# Altium PCB PCB1.PcbDoc (part 1 of 2)
Units mm, origin at the board's own origin, x right, y up, seen from the top; angles counter-clockwise.
Board outline 28 x 30 mm, 4 copper layers (Top Layer, GND, POWER, Bottom Layer), stack 0.778 mm thick; 63 components, 74 nets, 532 pads, 184 vias.
Unrouted connection lines stored in the file: 4.
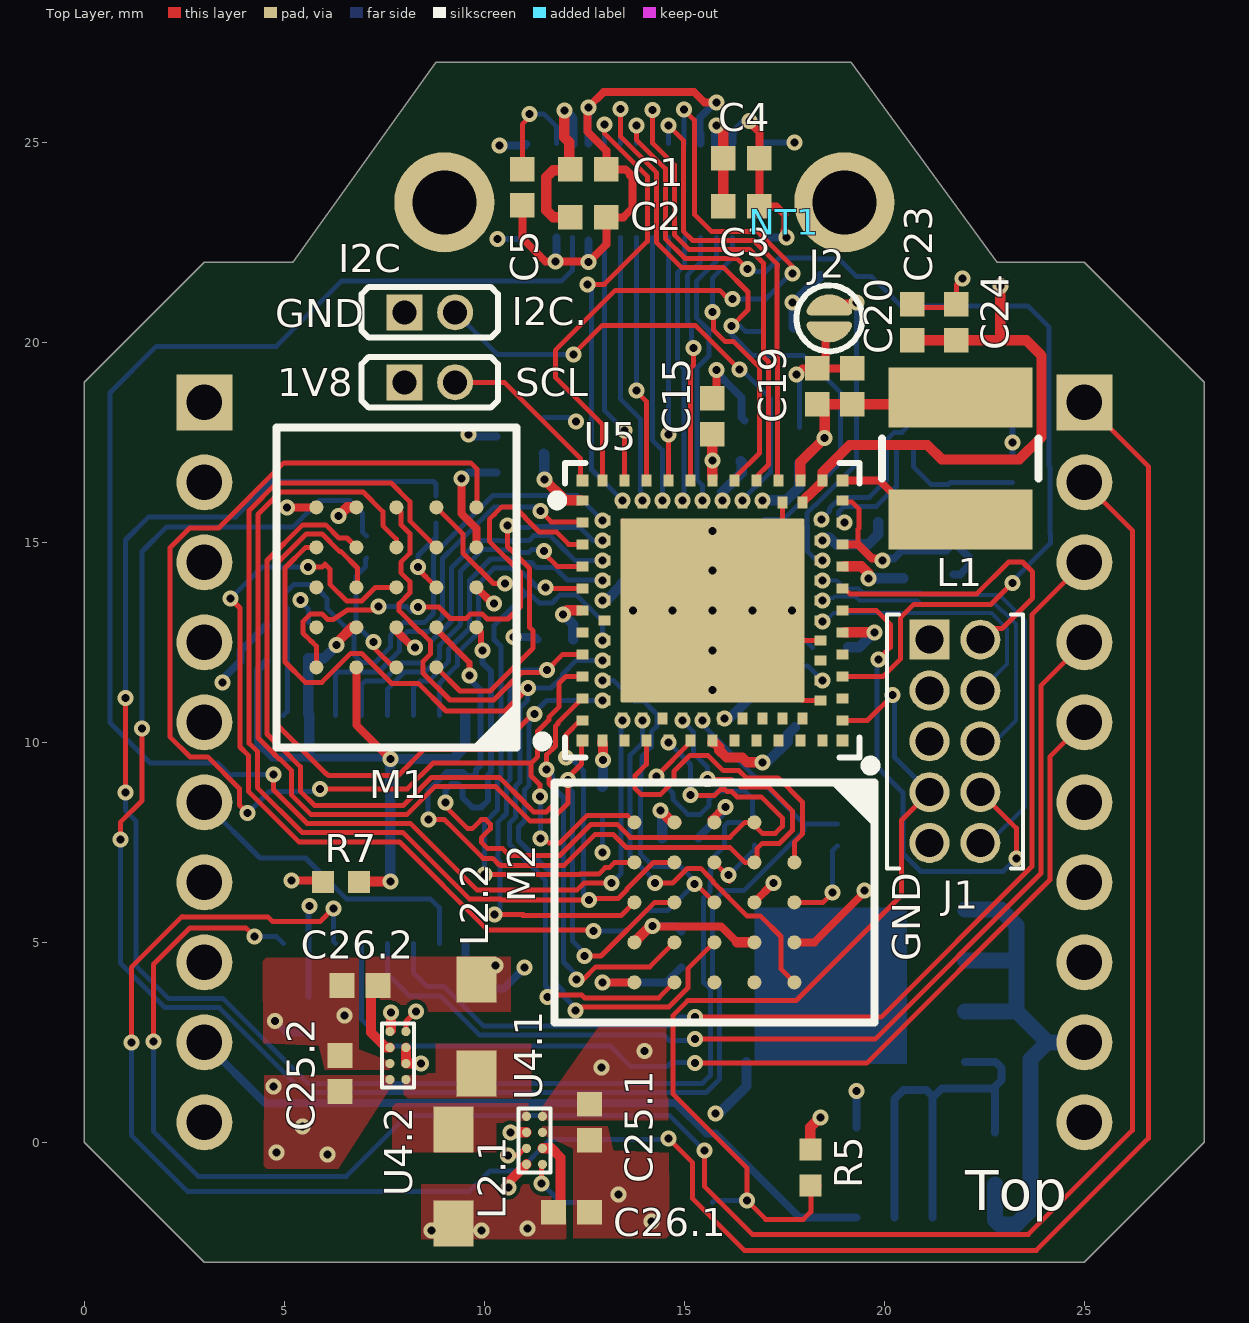
[diagram p0: Top Layer view]
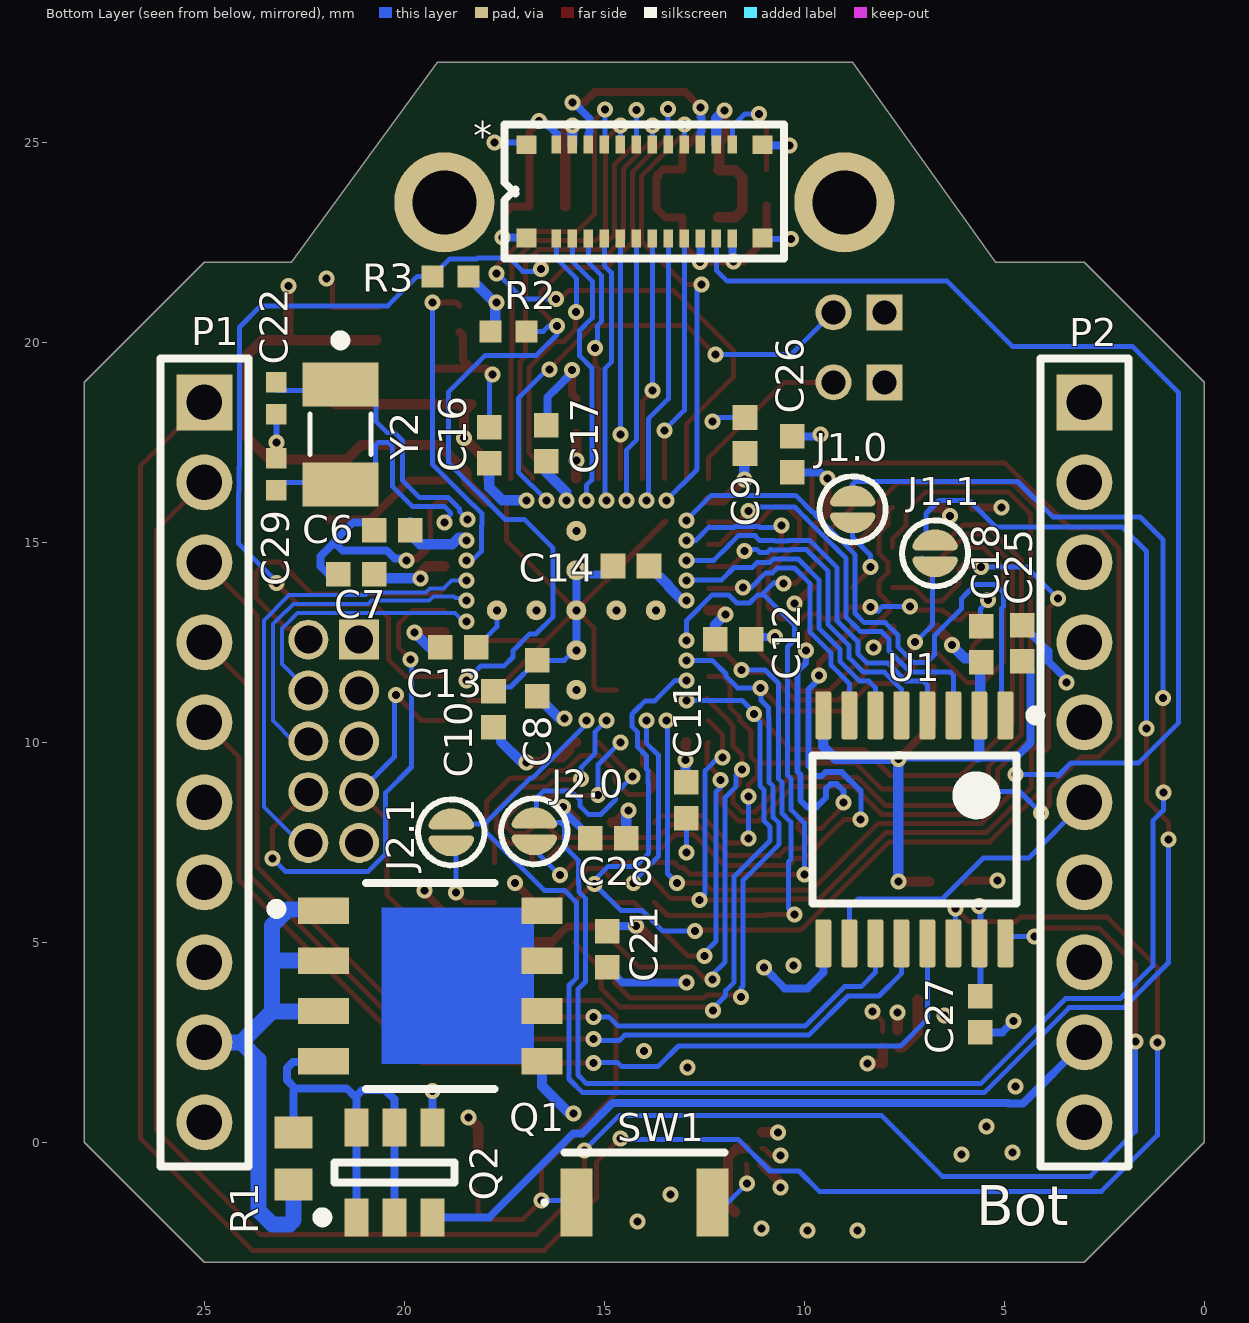
[diagram p1: Bottom Layer view, seen from below]
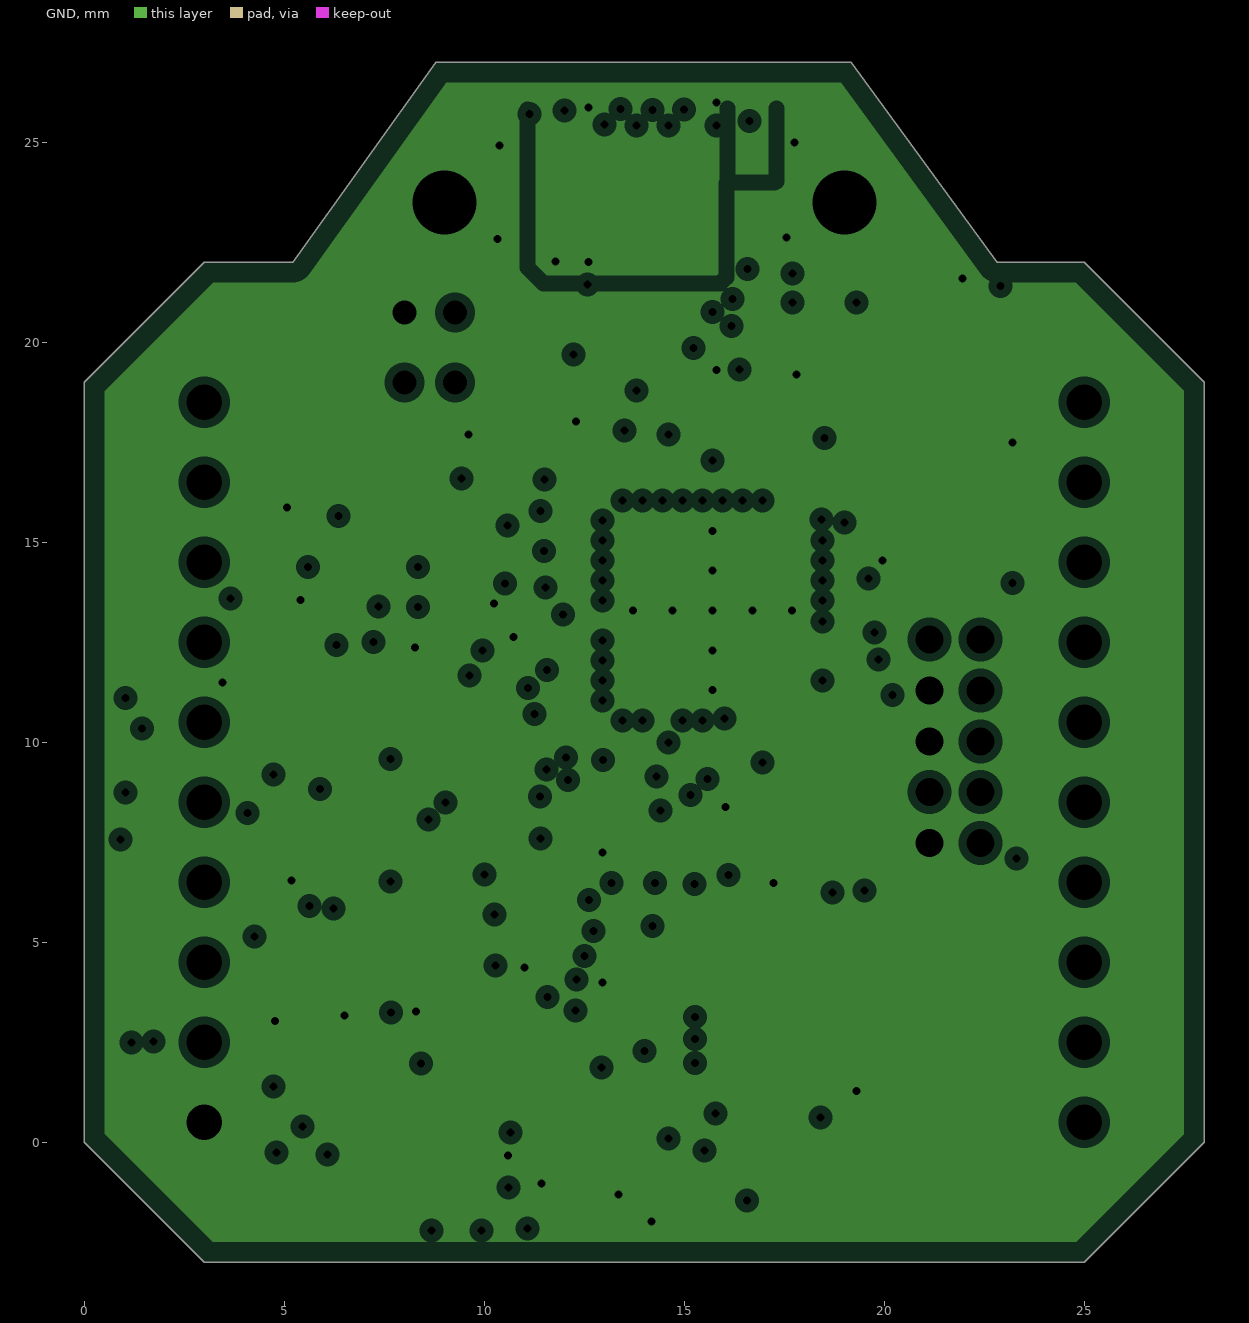
[diagram p2: GND, clearances drawn from the general rule]
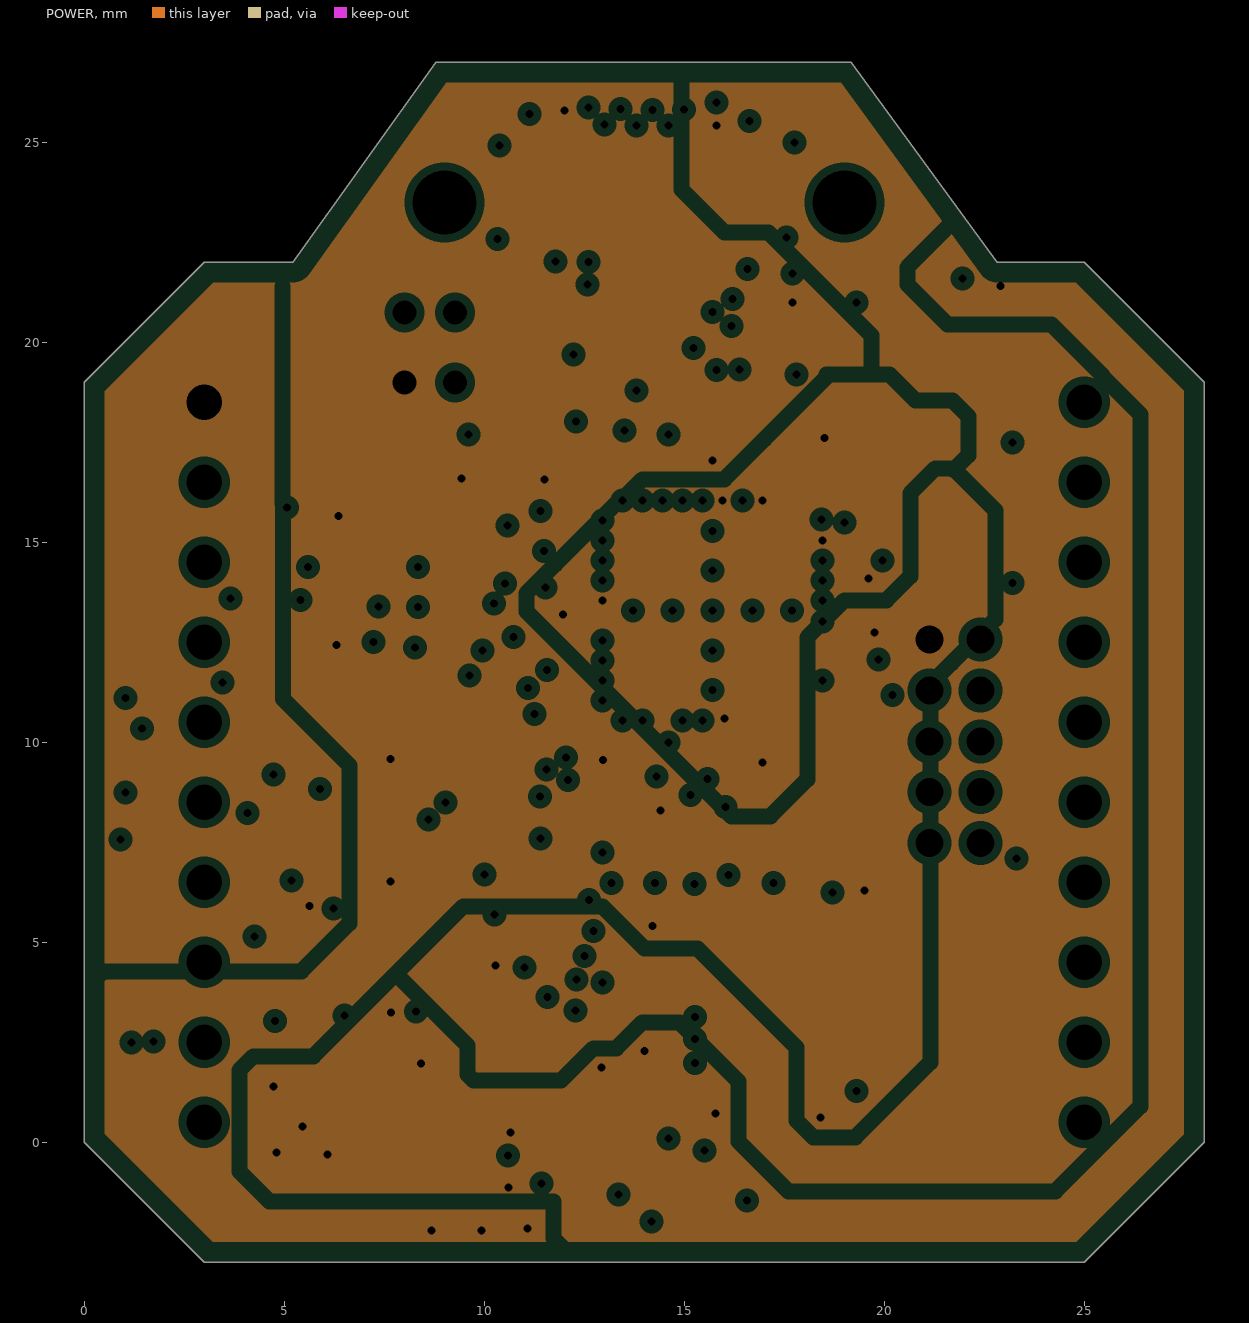
[diagram p3: POWER, clearances drawn from the general rule]

## Layer stack, top to bottom
Top Solder: solder mask 0.0102, Solder Resist, Dk 3.5
Top Layer: signal copper 0.0356
Dielectric 1: core 0.254, FR-4, Dk 4.2
GND: plane copper 0.036, net AGND
Dielectric 3: prepreg 0.127, Dk 4.2
POWER: plane copper 0.036, net (Multiple Nets)
Dielectric 2: core 0.254, Dk 4.2
Bottom Layer: signal copper 0.0356
Bottom Solder: solder mask 0.0102, Solder Resist, Dk 3.5

## Board outline
8.786,27 5.214,22 3,22 0,19 0,0 3,-3 25,-3 28,0 28,19 25,22 22.823,22 19.177,27

## Design rules (kind name [scope] priority, off if disabled: settings)
BoardOutlineClearance switch [InComponent('SW1')] p1: gap=0.2 ignorepadtopadclearanceinfootprint=FALSE except(-0.6: Track-OutlineEdge Track-CavityEdge Track-CutoutEdge Track-SplitBarrior Track-SplitContinuation)
BoardOutlineClearance [All] p2: gap=0.2 ignorepadtopadclearanceinfootprint=FALSE
Clearance Clearance_1 [ispad and InComponent('Q1') vs IsFill] p1: gap=0 ignorepadtopadclearanceinfootprint=FALSE
Clearance Clearance_pulp [All] p2: gap=0.1 ignorepadtopadclearanceinfootprint=FALSE except(0: Arc-Hole Track-Hole SMDPad-Hole THPad-Hole Via-Hole Fill-Hole Poly-Hole Region-Hole Text-Hole)
Clearance [All] p3: gap=0.1 ignorepadtopadclearanceinfootprint=FALSE
ComponentClearance ComponentClearance_moreweirdtphole [InComponent('TP27') vs InComponent('U2')] p1: gap=0 collisioncheckmode=3 verticalgap=0 showdistances=FALSE
ComponentClearance ComponentClearance_weird_tp_holes [InComponent('TP25') vs InComponent('TP26')] p2: gap=0 collisioncheckmode=3 verticalgap=0 showdistances=FALSE
ComponentClearance ComponentClearance_TPunderlatch [InComponent('U2') vs InComponent('TP23') or InComponent('JP21') or InComponent('JP27') or InComponent('JP24') or InComponent('JP25') or InComponent('JP26')] p3: gap=0 collisioncheckmode=3 verticalgap=0 showdistances=FALSE
ComponentClearance ComponentClearance_NetTie [InComponentClass('NetTie')] p4: gap=0 collisioncheckmode=3 verticalgap=0 showdistances=TRUE
ComponentClearance ComponentClearance_Hole [InComponentClass('Holes, Screws etc.')] p5: gap=0 collisioncheckmode=3 verticalgap=0 showdistances=TRUE
ComponentClearance [All] p6: gap=0.15 collisioncheckmode=3 verticalgap=0.15 showdistances=TRUE
DiffPairsRouting [All] p1: maxlimit=0.381 minlimit=0.125 mostfreqgap=0.125 toplayer_minwidth=0.125 toplayer_maxwidth=0.381 toplayer_prefwidth=0.3 bottomlayer_minwidth=0.125 bottomlayer_maxwidth=0.381 bottomlayer_prefwidth=0.3 maxuncoupledlength=12.7
FabricationTestpoint [All] p1: side=3 testpointundercomponent=TRUE minsize=0.5 maxsize=2.54 preferedsize=1.524 minholesize=0 maxholesize=1.016 preferedholesize=0.813 testpointgrid=0.025 allowsidetop=TRUE allowsidebottom=TRUE usegrid=TRUE gridtolerance=0
FanoutControl Fanout_BGA_1 [InComponent('U1')] p1: bgadir=Out bgaviamode=Centered fanoutstyle=BGA fanoutdirection=Alternating viagrid=0.025 // Fanout_BGA (Default Rule)
FanoutControl Fanout_BGA [IsBGA] p2: bgadir=Out bgaviamode=Centered fanoutstyle=Auto fanoutdirection=Alternating viagrid=0.025 // Fanout_BGA (Default Rule)
FanoutControl Fanout_LCC [IsLCC] p3: bgadir=Out bgaviamode=Centered fanoutstyle=Auto fanoutdirection=Alternating viagrid=0.025 // Fanout_LCC (Default Rule)
FanoutControl Fanout_SOIC [IsSOIC] p4: bgadir=Out bgaviamode=Centered fanoutstyle=Auto fanoutdirection=Alternating viagrid=0.025 // Fanout_SOIC (Default Rule)
FanoutControl Fanout_Small [(CompPinCount < 5)] p5: bgadir=Out bgaviamode=Centered fanoutstyle=Auto fanoutdirection=OutThenIn viagrid=0.025 // Fanout_Small (Default Rule)
FanoutControl Fanout_Default [All] p6: bgadir=Out bgaviamode=Centered fanoutstyle=Auto fanoutdirection=Alternating viagrid=0.025 // Fanout_Default (Default Rule)
Height [All] p1: minheight=0 maxheight=50 prefheight=12.7
HoleSize [All] p1: absolutevalues=TRUE maxlimit=5 minlimit=0.2 maxpercent=80.000 minpercent=20.000
HoleToHoleClearance [All] p1: gap=0.25 allowstackedmicrovias=FALSE
Length "InNet('CLK_0') Or InNet('CLK_1')" [InNet('CLK_0') Or InNet('CLK_1')] p1: maxlimit=36.773 minlimit=0
MatchedLengths [InDifferentialPair('CK2')] p1: tolerance=0.2 checknetsindiffpair=TRUE checkdiffpairvsdiffpair=FALSE checkxsignals=FALSE checkothers=FALSE
MinimumAnnularRing [All] p1: minimumring=0.1
MinimumSolderMaskSliver MinimumSolderMaskSliver_1 [InComponent('U2') and IsPad and InNet('GND')] p1: minsoldermaskwidth=0
MinimumSolderMaskSliver [All] p2: minsoldermaskwidth=0.095
PlaneClearance "Mounting Holes" [InPadClass('ExtendedClearance')] p1: clearance=2.1
PlaneClearance [All] p2: clearance=0.2
PlaneConnect [All] p1: pad.planeconnectstyle=Relief pad.reliefexpansion=0.25 pad.reliefentries=4 pad.reliefconductorwidth=0.3 pad.reliefairgap=0.2 via.planeconnectstyle=Direct via.reliefexpansion=0.25 via.reliefentries=4 via.reliefconductorwidth=0.3 via.reliefairgap=0.2
PolygonConnect PadDirectConnect [InComponent('C25.1')  OR InComponent('C25.2')      OR InComponent('U4.1') OR InComponent('U4.2')      OR  InComponent('L2.1')  OR InComponent('L2.2')   OR InComponent('C26.1')  OR InComponent('C26.2')] p1: connectstyle=Direct reliefconductorwidth=0.3 reliefentries=4 polygonreliefangle="90 Angle" airgapwidth=0.25
PolygonConnect [All] p2: thpad.connectstyle=Relief thpad.reliefconductorwidth=0.25 thpad.reliefentries=4 thpad.polygonreliefangle="90 Angle" thpad.airgapwidth=0.25 smdpad.connectstyle=Relief smdpad.reliefconductorwidth=0.25 smdpad.reliefentries=4 smdpad.polygonreliefangle="90 Angle" smdpad.airgapwidth=0.25 via.connectstyle=Direct via.reliefconductorwidth=0.25 via.reliefentries=4 via.polygonreliefangle="90 Angle" via.airgapwidth=0.25
RoomDefinition GAP [InComponentClass('Room Definition 1')] p1: confinementstyle=ConfineIn formatcopy=TRUE lockcomponents=FALSE outline 11.7,9.7 11.7,17.3 19.5,17.3 19.5,9.7
RoutingVias [All] p1: holewidth=0.2 width=0.45 viastyle="Through Hole" minholewidth=0.2 minwidth=0.4 maxholewidth=0.3 maxwidth=1
ShortCircuit ShortCircuit_variant_footprint [IsPad and not InAnyNet vs IsPad and not InAnyNet] p1: allowed=TRUE
ShortCircuit [All] p2: allowed=FALSE
SilkToSilkClearance "SilkText Exception" [OnSilkscreen  And (IsText And Not IsDesignator) vs OnSilkscreen  And ((IsText And Not IsDesignator) or IsTrack)] p1: silktosilkclearance=0
SilkToSilkClearance [All] p2: silktosilkclearance=0.1
SilkToSolderMaskClearance [IsPad] p1: minsilkscreentomaskgap=0.1 clearancetoexposedcopper=TRUE
SolderMaskExpansion [All] p1: expansion=0.075
Width Width_PWR [InNetClass('POWER')] p1: maxlimit=0.6 minlimit=0.15 preferedwidth=0.2 minimp=50.000000 maximp=50.000000 favimp=50.000000
Width [All] p2: maxlimit=0.6 minlimit=0.1 preferedwidth=0.15 minimp=50.000000 maximp=50.000000 favimp=50.000000
13 further rules are at their usual default settings.

## Classes and differential pairs
net class Undefined: CK2_n CK2_p DQ0 DQ1 DQ2 DQ3 DQ4 DQ5 DQ6 DQ7 HYPER.RWDS
net class POWER: 1V8 2V8 3V0 PULP_VCC VCOM VCOM_CF
component class Power: C25 C25.1 C25.2 C26.1 C26.2 C27 L2.1 L2.2 Q1 Q2 R1 R7 U1 U4.1 U4.2
component class GAPandPeripherals: * C1 C2 C3 C4 C5 C6 C7 C8 C9 C10 C11 C12 C13 C14 C15 C16 C17 C18 C19 C20 C21 C22 C23 C24 C26 C28 C29 I2C I2C. J1 J1.0 J1.1 J2 J2.0 J2.1 L1 M1 M2 NT1 P1 P2 R2 R3 R5 SW1 U5 Y2
differential pair CK2: +CK2_p -CK2_n

## Components (designator, comment, footprint, x,y, rotation, side; value= is the part's Value field where it differs from the comment)
* "HM01B0_NeoPac" CONNECTOR_5037722410 14,23.85 r270 bottom
C1 "100nF" CAPC0402(1005)60_N 12.6,24.325 r180 top
C2 "10uF" CAPC0402(1005)60_N 12.6,23.125 r180 top
C3 "100nF" CAPC0402(1005)60_N 16.425,23.4 r180 top locked
C4 "10uF" CAPC0402(1005)60_N 16.425,24.6 r180 top
C5 "100nF" CAPC0402(1005)60_N 10.95,23.875 r270 top
C6 "100nF" CAPC0402(1005)60_N 20.3,15.3 r180 bottom
C7 "100nF" CAPC0402(1005)60_N 21.2,14.2 r180 bottom
C8 "100nF" CAPC0402(1005)60_N 16.675,11.6 r270 bottom
C9 "100nF" CAPC0402(1005)60_N 11.48,17.67 r270 bottom
C10 "100nF" CAPC0402(1005)60_N 17.768,10.825 r270 bottom
C11 "100nF" CAPC0402(1005)60_N 12.95,8.55 r90 bottom
C12 "100nF" CAPC0402(1005)60_N 11.775,12.575 r0 bottom
C13 "100nF" CAPC0402(1005)60_N 18.65,12.375 r0 bottom
C14 "100nF" CAPC0402(1005)60_N 14.336,14.408 r180 bottom
C15 "100nF" CAPC0402(1005)60_N 15.7,18.15 r270 top
C16 "100nF" CAPC0402(1005)60_N 17.875,17.425 r270 bottom
C17 "100nF" CAPC0402(1005)60_N 16.45,17.475 r270 bottom
C18 "100nF" CAPC0402(1005)60_N 5.575,12.45 r270 bottom
C19 "4.7uF" CAPC0402(1005)60_N 18.325,18.9 r270 top
C20 "100nF" CAPC0402(1005)60_N 19.2,18.9 r270 top
C21 "100nF" CAPC0402(1005)60_N 14.925,4.825 r90 bottom
C22 "10pF" CAPC0402(1005)60_L 23.2,18.6 r90 bottom
C23 "4.7uF" CAPC0402(1005)60_N 20.7,20.5 r270 top
C24 "100nF" CAPC0402(1005)60_N 21.8,20.5 r270 top
C25 "100nF" CAPC0402(1005)60_N 4.55,12.475 r270 bottom
C25.1 "4.7uF" CAPC0402(1005)60_N 12.629,0.5 r90 top
C25.2 "4.7uF" CAPC0402(1005)60_N 6.39,1.72 r270 top
C26 "100nF" CAPC0402(1005)60_N 10.3,17.2 r270 bottom
C26.1 "10uF" CAPC0402(1005)60_N 12.179,-1.75 r180 top
C26.2 "10uF" CAPC0402(1005)60_N 6.89,3.92 r0 top
C27 "100nF" CAPC0402(1005)60_N 5.6,3.2 r270 bottom
C28 "100nF" CAPC0402(1005)60_N 14.9,7.6 r180 bottom
C29 "10pF" CAPC0402(1005)60_L 23.2,16.7 r270 bottom
I2C "GRPB012VWVN-RC" "Pin Header, 1x2, TH" 8.635,19 r0 top
I2C. "GRPB012VWVN-RC" "Pin Header, 1x2, TH" 8.635,20.75 r0 top
J1 "20021111-00010T4LF" 20021111-00010T4LF 21.765,10.025 r270 top
J1.0 "Solder Jumper" "Small Solder Jumper" 8.79,15.825 r270 bottom value=1
J1.1 "Solder Jumper" "Small Solder Jumper" 6.73,14.725 r270 bottom value=1
J2 "Solder Jumper" "Small Solder Jumper" 18.625,20.6 r270 top value=1
J2.0 "Solder Jumper" "Small Solder Jumper" 16.75,7.775 r270 bottom value=1
J2.1 "Solder Jumper" "Small Solder Jumper" 18.825,7.75 r270 bottom value=1
L1 "SRN4026-220M" SRN4026 21.898,17.1 r270 top value=22uH
L2.1 "74479775222" "SMD 0805_A" 9.231,-0.85 r270 top
L2.2 "74479775222" "SMD 0805_A" 9.8,2.9 r90 top
M1 "S71KS512SC0" FBGA24_A-130 7.8,13.875 r180 top
M2 "S71KS512SC0" FBGA24_A-130 15.75,6 r270 top
NT1 "Net Tie" "Net Tie" 17.5,23 r270 top net-tie
P1 "MTMM-110-03-T-S-126" SMTC-MTMM-110-03-X-S-126 25,18.5 r270 bottom locked
P2 "MTMM-110-03-T-S-126" SMTC-MTMM-110-03-X-S-126 3,18.5 r270 bottom locked
Q1 "SI7157DP-T1-GE3" PowerPAK_SO-8_V 19.35,3.91 r180 bottom
Q2 "NTGS3130NT1G" ONSC-TSOP-6-318G-02_V 20.25,-0.75 r90 bottom
R1 "100k" RESC1609X50X30NL8T20 22.77,-0.4 r270 bottom
R2 "10k" RESC1005X40X25NL05T05 17.39,20.27 r0 bottom
R3 "10k" RESC1005X40X25NL05T05 18.85,21.65 r180 bottom
R5 "10K" RESC1005X40X25NL05T05 18.15,-0.625 r90 top
R7 "10k" RESC1005X40X25NL05T05 6.42,6.51 r0 top
SW1 "B3U-3000P" OMRON-B3U-3000P_V 14,-1.5 r180 bottom
U1 "TXB0106PWR" PW0016A_L 7.25,7.825 r270 bottom
U4.1 "TPS62743YFPR" YFP0008AAAA 11.254,0.05 r0 top
U4.2 "TPS62743YFPR" YFP0008AAAA 7.84,2.17 r180 top
U5 "GAP8" RKC0088A_V 15.7,13.3 r0 top
Y2 "ABS07-32.768KHZ-7-T" ABRA-ABS07-2_V 21.6,17.7 r270 bottom

## Footprints (in the part's own frame and the unit in brackets; to place one, negate y for a bottom-side part, rotate by r counter-clockwise, add the part's x,y. Pads: shape width x height; smd on the part's side, far side on the other; paste and mask are expansions set on the pad)
20021111-00010T4LF [mm] "Terminal Assembly, 2x5 Pin, Vertical, 1.27mm Pitch, Male"
  rect 1x1 hole 0.7: 1(-2.54,-0.635)
  round 1 hole 0.7: 2(-2.54,0.635) 3(-1.27,-0.635) 4(-1.27,0.635) 5(0,-0.635) 6(0,0.635) 7(1.27,-0.635) 8(1.27,0.635) 9(2.54,-0.635) 10(2.54,0.635)
  silkscreen extent -3.17,-1.7 3.18,1.7, body extent -3.17,-1.7 3.18,1.7, height 5.51
ABRA-ABS07-2_V [mm] "Crystal, 2-Leads, Body 3.2x1.5mm, Pitch 2.5mm"
  rect 1.1x1.9 smd: 1(-1.25,0) 2(1.25,0)
  silkscreen extent -2.47,-0.76 0.51,0.76, body extent -1.6,-0.75 1.6,0.75, height 0.9
CAPC0402(1005)60_L [mm] "Chip Capacitor, Body 1.0x0.5mm, Height 0.6mm, IPC High Density"
  rect 0.52x0.52 smd: 1(-0.4,0) 2(0.4,0)
  body extent -0.55,-0.3 0.55,0.3, height 0.6
CAPC0402(1005)60_N [mm] "Chip Capacitor, Body 1.0x0.5mm, Height 0.6mm, IPC Medium Density"
  rect 0.62x0.62 smd: 1(-0.45,0) 2(0.45,0)
  body extent -0.55,-0.3 0.55,0.3, height 0.6
CONNECTOR_5037722410 [mm]
  rect 0.47x0.5 smd mask+0.102: 0(-1.09,2.95) 0(-1.09,-2.95) 0(1.24,-2.95) 0(1.24,2.95)
  rect 0.45x0.24 smd mask+0.025: 1(-1.1,-2.2) 2(-1.1,-1.8) 3(-1.1,-1.4) 4(-1.1,-1) 5(-1.1,-0.6) 6(-1.1,-0.2) 7(-1.1,0.2) 8(-1.1,0.6) 9(-1.1,1) 10(-1.1,1.4) 11(-1.1,1.8) 12(-1.1,2.2) 13(1.25,2.2) 14(1.25,1.8) 15(1.25,1.4) 16(1.25,1) 17(1.25,0.6) 18(1.25,0.2) 19(1.25,-0.2) 20(1.25,-0.6) 21(1.25,-1) 22(1.25,-1.4) 23(1.25,-1.8) 24(1.25,-2.2)
  silkscreen extent -1.6,-3.5 1.75,3.49
FBGA24_A-130 [mm] "BGA, 24-Balls, Body 8x6mm, Pitch 1mm, A1 missing"
  round 0.35 smd paste-0.5: A2(-1,2) A3(0,2) A4(1,2) A5(2,2) B1(-2,1) B2(-1,1) B3(0,1) B4(1,1) B5(2,1) C1(-2,0) C2(-1,0) C3(0,0) C4(1,0) C5(2,0) D1(-2,-1) D2(-1,-1) D3(0,-1) D4(1,-1) D5(2,-1) E1(-2,-2) E2(-1,-2) E3(0,-2) E4(1,-2) E5(2,-2)
  silkscreen extent -3.78,-4 3,4, body extent -3,-4 3,4, height 1.3
"Net Tie" [mm] "Net Tie, 0.15mm width, 0.5mm length"
  round 0.15 smd mask-0.2: 1(-0.25,0) 2(0.25,0)
  Top Layer lines w0.15: 0.25,0 -0.25,0
OMRON-B3U-3000P_V [mm] "SMD, 2-Leads, Body 4x3.2mm"
  rect 0.8x1.7 smd: 1(-1.7,0) 2(1.7,0)
  silkscreen extent -2.55,-0.05 2,1.25, body extent -2,-1.95 2,1.25, height 1.2
ONSC-TSOP-6-318G-02_V [mm] "SOP, 6-Leads, Body 3x1.5mm, Pitch 0.95mm"
  rect 0.95x0.6 smd: 1(-1.125,0.95) 2(-1.125,0) 3(-1.125,-0.95) 4(1.125,-0.95) 5(1.125,0) 6(1.125,0.95)
  silkscreen extent -1.25,-1.5 0.25,1.93, body extent -0.75,-1.5 0.75,1.5, height 1.1
"Pin Header, 1x2, TH" [mm] "Terminal Assembly, 1x2 Pins, Vertical, 1.27mm Pitch, Male, TH"
  rect 0.9x0.9 hole 0.6: 1(-0.635,0)
  round 0.9 hole 0.6: 2(0.635,0)
  silkscreen extent -1.7,-0.63 1.7,0.64, body extent -1.7,-0.63 1.7,0.64, height 6.3
PowerPAK_SO-8_V [mm] "PowerPAK SO-8, 8-Leads, Body 6.15x5.15mm, Pitch 1.25mm"
  rect 1.27x0.66 smd: 1(-2.67,1.88) 2(-2.67,0.627) 3(-2.67,-0.627) 4(-2.67,-1.88)
  rect 1.02x0.66 smd: 5(2.795,-1.88) 6(2.795,-0.627) 7(2.795,0.627) 8(2.795,1.88)
  Top Layer region: -1.215,1.955 2.595,1.955 2.595,-1.955 -1.215,-1.955
  silkscreen extent -3.98,-2.58 1.61,2.57, body extent -3.07,-2.57 3.08,2.58, height 1.04
PW0016A_L [mm] "SOP, 16-Leads, Body 5.1x4.5mm, Pitch 0.65mm, IPC High Density"
  rrect25% 1.2x0.4 smd: 1(-2.85,2.275) 2(-2.85,1.625) 3(-2.85,0.975) 4(-2.85,0.325) 5(-2.85,-0.325) 6(-2.85,-0.975) 7(-2.85,-1.625) 8(-2.85,-2.275) 9(2.85,-2.275) 10(2.85,-1.625) 11(2.85,-0.975) 12(2.85,-0.325) 13(2.85,0.325) 14(2.85,0.975) 15(2.85,1.625) 16(2.85,2.275)
  silkscreen extent -2.97,-2.55 1.85,3.15, body extent -3.21,-2.5 3.21,2.5, height 1
RESC1005X40X25NL05T05 [mm] "Chip Resistor, 2-Leads, Body 1.05x0.55mm, IPC Medium Density"
  rect 0.55x0.55 smd: 1(-0.45,0) 2(0.45,0)
  body extent -0.53,-0.28 0.53,0.28, height 0.4
RESC1609X50X30NL8T20 [mm] "Chip Resistor, 2-Leads, Body 1.65x0.95mm, IPC Medium Density"
  rect 0.8x0.95 smd: 1(-0.65,0) 2(0.65,0)
  body extent -0.82,-0.48 0.82,0.48, height 0.5
RKC0088A_V [mm] "QFN, 88-Leads, Body 7x7mm, Pitch 0.55mm, Thermal Pad 4.6x4.6mm, TI Recommend"
  rect 0.3x0.249 smd mask+0.035: A1(-3.25,2.75) A2(-3.25,2.2) A3(-3.25,1.65) A4(-3.25,1.1) A5(-3.25,0.55) A6(-3.25,0) A7(-3.25,-0.55) A8(-3.25,-1.1) A9(-3.25,-1.65) A10(-3.25,-2.2) A11(-3.25,-2.75) A23(3.25,-2.75) A24(3.25,-2.2) A25(3.25,-1.65) A26(3.25,-1.1) A27(3.25,-0.55) A28(3.25,0) A29(3.25,0.55) A30(3.25,1.1) A31(3.25,1.65) A32(3.25,2.2) A33(3.25,2.75) B1(-2.7,2.25) B2(-2.7,1.75) B3(-2.7,1.25) B4(-2.7,0.75) B5(-2.7,0.25) B6(-2.7,-0.25) B7(-2.7,-0.75) B8(-2.7,-1.25) B9(-2.7,-1.75) B10(-2.7,-2.25) B21(2.7,-2.25) B22(2.7,-1.75) B23(2.7,-1.25) B24(2.7,-0.75) B25(2.7,-0.25) B26(2.7,0.25) B27(2.7,0.75) B28(2.7,1.25) B29(2.7,1.75) B30(2.7,2.25)
  rect 0.249x0.3 smd mask+0.035: A12(-2.75,-3.25) A13(-2.2,-3.25) A14(-1.65,-3.25) A15(-1.1,-3.25) A16(-0.55,-3.25) A17(0,-3.25) A18(0.55,-3.25) A19(1.1,-3.25) A20(1.65,-3.25) A21(2.2,-3.25) A22(2.75,-3.25) A34(2.75,3.25) A35(2.2,3.25) A36(1.65,3.25) A37(1.1,3.25) A38(0.55,3.25) A39(0,3.25) A40(-0.55,3.25) A41(-1.1,3.25) A42(-1.65,3.25) A43(-2.2,3.25) A44(-2.75,3.25) B11(-2.25,-2.7) B12(-1.75,-2.7) B13(-1.25,-2.7) B14(-0.75,-2.7) B15(-0.25,-2.7) B16(0.25,-2.7) B17(0.75,-2.7) B18(1.25,-2.7) B19(1.75,-2.7) B20(2.25,-2.7) B31(2.25,2.7) B32(1.75,2.7) B33(1.25,2.7) B34(0.75,2.7) B35(0.25,2.7) B36(-0.25,2.7) B37(-0.75,2.7) B38(-1.25,2.7) B39(-1.75,2.7) B40(-2.25,2.7)
  rect 0.3x0.3 smd mask+0.035: D1(-3.25,3.25) D2(-3.25,-3.25) D3(3.25,-3.25) D4(3.25,3.25)
  round 0.5 hole 0.2 mask+0.035: PAD(-1.987,0) PAD(-1,0) PAD(0,-1.987) PAD(0,-1) PAD(0,0) PAD(0,1) PAD(0,1.987) PAD(1,0) PAD(1.987,0)
  rrect36% 0.275x1.7 smd mask+0.035: PAD(-1.987,-1) PAD(-1.987,1) PAD(1.987,-1) PAD(1.987,1)
  rrect36% 1.7x0.275 smd mask+0.035: PAD(-1,-1.987) PAD(-1,1.987) PAD(1,-1.987) PAD(1,1.987)
  rrect2% 4.6x4.6 smd paste-5 mask+0.035: PAD(0,0)
  silkscreen extent -4,-3.68 3.68,3.68, body extent -3.5,-3.5 3.5,3.5, height 0.95
"Small Solder Jumper" [mm] "Small Solder Jumper (shortcut with a drop of tin if needed)"
  round 0.525 smd paste-5 mask+0: 1(-0.337,0) 2(0.337,0)
  oval 0.52x0.63 smd paste-5 mask+0: 1(-0.335,0) 2(0.335,0)
  oval 0.51x0.71 smd paste-5 mask+0: 1(-0.33,0) 2(0.33,0)
  oval 0.5x0.76 smd paste-5 mask+0: 1(-0.325,0) 2(0.325,0)
  oval 0.49x0.8 smd paste-5 mask+0: 1(-0.32,0) 2(0.32,0)
  oval 0.475x0.84 smd paste-5 mask+0: 1(-0.312,0) 2(0.312,0)
  oval 0.465x0.865 smd paste-5 mask+0: 1(-0.308,0) 2(0.308,0)
  oval 0.45x0.897 smd paste-5 mask+0: 1(-0.3,0) 2(0.3,0)
  oval 0.425x0.943 smd paste-5 mask+0: 1(-0.288,0) 2(0.288,0)
  oval 0.4x0.981 smd paste-5 mask+0: 1(-0.275,0) 2(0.275,0)
  oval 0.375x1.013 smd paste-5 mask+0: 1(-0.262,0) 2(0.262,0)
  oval 0.35x1.04 smd paste-5 mask+0: 1(-0.25,0) 2(0.25,0)
  oval 0.325x1.063 smd paste-5 mask+0: 1(-0.238,0) 2(0.238,0)
  oval 0.3x1.082 smd paste-5 mask+0: 1(-0.225,0) 2(0.225,0)
  oval 0.275x1.098 smd paste-5 mask+0: 1(-0.212,0) 2(0.212,0)
  oval 0.25x1.112 smd paste-5 mask+0: 1(-0.2,0) 2(0.2,0)
  oval 0.225x1.125 smd paste-5 mask+0: 1(-0.188,0) 2(0.188,0)
  oval 0.2x1.137 smd paste-5 mask+0: 1(-0.175,0) 2(0.175,0)
  silkscreen extent -0.83,-0.83 0.83,0.82
"SMD 0805_A" [mm] "Chip Inductor, 2-Leads, Body 2,0x1,2mm"
  rect 1.15x1 smd: 1(-1.175,0) 2(1.175,0)
  body extent -1,-0.6 1,0.6, height 0.89
SMTC-MTMM-110-03-X-S-126 [mm] "Terminal Strip Assembly, 1x10 Pins, Vertical, 2mm Pitch, Male"
  rect 1.4x1.4 hole 0.89: 1(0,0)
  round 1.4 hole 0.89: 2(2,0) 3(4,0) 4(6,0) 5(8,0) 6(10,0) 7(12,0) 8(14,0) 9(16,0) 10(18,0)
  silkscreen extent -1.1,-1.1 19.1,1.1, body extent -0.99,-1 18.99,1, height 4.7
SRN4026 [mm] "Semi-Shielded Wirewound Inductor"
  rect 1.5x3.6 smd: 1(-1.525,0) 2(1.525,0)
  silkscreen extent -0.5,-1.95 0.5,1.95, body extent -1.95,-1.95 1.95,1.96, height 2.11
YFP0008AAAA [mm] "DSBGA, 8-Leads, Body 0.8x1.6mm, Pitch 0.4mm"
  round 0.23 smd paste-0.13 mask+0.038: A1(-0.2,0.6) A2(0.2,0.6) B1(-0.2,0.2) B2(0.2,0.2) C1(-0.2,-0.2) C2(0.2,-0.2) D1(-0.2,-0.6) D2(0.2,-0.6)
  silkscreen extent -0.4,-0.8 0.4,0.8, body extent -0.4,-0.8 0.4,0.8, height 0.51

## Part data
C1 C3 C5 C6 C7 C8 C9 C10 C11 C12 C13 C14 C15 C16 C17 C18 C20 C21 C24 C25 C26 C27 C28: library part CMP-1034-02065-1, "CAP 100nF 10V ±10% 0402 (1005 Metric) Thickness 0.6mm SMD", Case-EIA=0402, Case-Metric=1005, Rated Voltage="10 V", Tolerance=±10%, Max Thickness="0.6 mm", Technology=SMT
C2 C4 C26.1 C26.2: library part CMP-1034-02138-1, "CAP 10uF 6.3V ±20% 0402 (1005 Metric) Thickness 0.6mm SMD", Case-EIA=0402, Case-Metric=1005, Rated Voltage="6.3 V", Tolerance=±20%, Max Thickness="0.6 mm", Technology=SMT
C19 C23 C25.1 C25.2: library part CMP-1034-02137-1, "CAP 4.7uF 6.3V ±20% 0402 (1005 Metric) Thickness 0.6mm SMD", Case-EIA=0402, Case-Metric=1005, Rated Voltage="6.3 V", Tolerance=±20%, Max Thickness="0.6 mm", Technology=SMT
C22 C29: library part CMP-1034-00722-1, "CAP 10pF 50V ±2% 0402 (1005 Metric) Thickness 0.6mm SMD", Case-EIA=0402, Case-Metric=1005, Rated Voltage="50 V", Tolerance=±2%, Max Thickness="0.6 mm", Technology=SMT
I2C I2C.: library part CMP-00149-1, "CONN HEADER 1.27mm Pitch 1x2 POS TH DL PCB AU", Color=-, Manufacturer="Sullins Connector Solutions", Supplier Part Number=S9015E-01-ND, ComponentLink1Description=GRPB_%20_2VWVN-RC%2010954-C.pdf, ComponentLink1URL=http://media.digikey.com/pdf/Data%20Sheets/Sullins%20PDFs/GRPB_%20_2VWVN-RC%2010954-C.pdf, Connector Type="Header, Unshrouded", Contact Finish=Gold, Contact Finish Thickness=Flash, Contact Type="Male Pin", Fastening Type=-, Features=-, Manufacturer Part Number=GRPB012VWVN-RC, Mounting Type="Through Hole", Number of Positions=2, Number of Positions Loaded=All, Number of Rows=2, Packaging=Bulk, Pitch=-, Supplier=Digi-Key, Termination=Solder
J1: library part CMP-01117-1, "CONN HEADER VERT 10POS 1.27MM", Color=Black, Contact resistance=30mR, Current Rating=10A, Insulation resistance=100MR, Max Operating Temperature=85°C, Max Voltage Rating (AC)=125V, Min Operating Temperature=-40°C, Package Quantity=93, Connector Type="Male Pin,Header", Contact material="Nickel,Copper,Copper Alloy,Gold", Contact Mating Length=0.12inch, Contact Plating=Gold, Contact Post Length=2.3mm, Depth=3.4mm, Gender=Male, Housing Color=Black, Housing material=Plastic, Lead Free="Lead Free", Length=6.35mm, Mount="Through Hole", Number of Contacts=10, Number of Positions=10, Number of Rows=2, Orientation=Straight, Packaging=Rail/Tube, Pitch=1.27mm, Radiation Hardening=No, REACH SVHC="No SVHC", Row Spacing=0.05inch, Stack Height=2.5mm, Termination=Solder, Voltage Rating=125V
J1.0 J1.1 J2 J2.0 J2.1: library part CMP-00005-4, Technology=SMT
L1: library part CMP-00905-1, "Inductor Power Semi-Shielded Wirewound 22uH 20% 100KHz 11Q-Factor Ferrite 670mA 234mOhm DCR 1515 T/R", Case/Package=Nonstandard, Current Rating=670mA, DC Resistance (DCR)=234mR, Inductance=22uh, Inductance Tolerance=20%, Max Operating Temperature=125°C, Min Operating Temperature=-40°C, Package Quantity=3000, Self Resonant Frequency=16MHz, Test Frequency=100kHz, Composition=Wirewound, Core Material=Ferrite, Depth=4mm, Height=2.5mm, Height - Seated (Max)=0.098inch, Length=4mm, Max DC Current=670mA, Mount="Surface Mount", Packaging="Tape and Reel", REACH SVHC="No SVHC", RMS Current (Irms)=670mA, Saturation Current=670mA, Shielding=Shielded, Termination=SMD/SMT, Tolerance=20%, Weight=0.004938oz, Width=4mm
L2.1 L2.2: library part CMP-1392-00029-1, "Power Multilayer Inductor WE-PMI, L=2.20 µH", Inductance=2.20µH, Manufacturer="Wuerth Elektronik", ComponentLink1Description="Manufacturer URL", ComponentLink1URL=http://www.we-online.com, ComponentLink2Description=Datasheet, ComponentLink2URL=http://katalog.we-online.de/kataloge/eisos/media/pdf/74479775222A.pdf, PackageReference="SMD 0805_A", PartNumber=74479775222
M1 M2: library part CMP-00514-2, "IC 512MB FLASH 64MB DRAM 24FBGA", Manufacturer="Cypress Semiconductor Corp", Package / Case=24-VBGA, Supplier Device Package=24-FBGA(6x8), Voltage - Supply=1.8V, Interface="Parallel, Serial", Memory Format="FLASH, RAM", Memory Size="512Mbit Flash, 64Mbit RAM", Memory Type=Non-Volatile, Series="HyperFlash™ + HyperRAM™ KS", Speed=100MHz
NT1: library part CMP-00050-2, "Net Tie - 0.15mm width, 0.5mm length"
P1 P2: library part CMP-1029-00120-1, "Modified Through-Hole Header, Vertical, -55 to 105 degC, 2 mm Pitch, 10-Pin, Male, RoHS", Manufacturer=Samtec, Temperature Range="-55 to 105 degC", ComponentLink1Description="Manufacturer URL", ComponentLink1URL=http://www.samtec.com, ComponentLink2Description=Datasheet, ComponentLink2URL=http://d2a072wq521u33.cloudfront.net/catalog_english//MTMM_TH.PDF, ComponentLink3Description="Package Specification", ComponentLink3URL=http://www.samtec.com/documents/webfiles/cpdf/MTMM-1XX-XX-XX-X-XXX-XX-XXX-MKT.pdf, DatasheetVersion=F-214, Mounting Technology=Through-hole, Orientation=Vertical, PackageDescription="2mm Terminal Strip Assembly", PackageReference=MTMM-110-03-X-S-126, PackageVersion="AE, 12/1993", PartNumber=MTMM-110-03-T-S-126, Pitch="2 mm", RoHS=True
Q1: library part CMP-01116-1, "MOSFET, P CHANNEL, -20V, -60A, POWERPAK SO-8", Continuous Drain Current (ID)=-60A, Drain to Source Breakdown Voltage=-20V, Drain to Source Resistance=1.25mR, Drain to Source Voltage (Vdss)=20V, Gate to Source Voltage (Vgs)=12V, Input Capacitance=22nF, Max Operating Temperature=150°C, Max Power Dissipation=104W, Min Operating Temperature=-55°C, Package Quantity=3000, Power Dissipation=6.25W, Threshold Voltage=-1.4V, Contact Plating=Tin,Matte, Element Configuration=Single, Fall Time=55ns, Lead Free="Lead Free", Mount="Surface Mount", Number of Channels=1, Number of Elements=1, Number of Pins=8, Packaging="Tape and Reel", Radiation Hardening=No, Rds On Max=1.6mR, REACH SVHC=Unknown, Rise Time=14ns, Turn-Off Delay Time=220ns, Turn-On Delay Time=20ns, Weight=0.01787oz
Q2: library part CMP-1058-00957-1, "Power MOSFET, 20 V, 5.6 A Single, N-Channel, 6-Pin TSOP, Pb-Free, Tape and Reel", Manufacturer="On Semiconductor", Package Type=TSOP-6, Channel Polarity="N Channel", ComponentLink1Description="Manufacturer URL", ComponentLink1URL=http://www.onsemi.com/, ComponentLink2Description=Datasheet, ComponentLink2URL=http://www.onsemi.com/pub_link/Collateral/NTGS3130N-D.PDF, ComponentLink3Description="Package Specification", ComponentLink3URL=http://www.onsemi.com/pub_link/Collateral/318G-02.PDF, Configuration=Single, DatasheetVersion="Rev. 0", Mounting Technology="Surface Mount", PackageDescription="6-Pin Small Outline Package, Body 3 x 1.5 mm, Pitch 0.95 mm", PackageReference=TSOP-6-318G-02, PackageVersion="Rev. V, 06/2012", Packing="Tape and Reel", PartNumber=NTGS3130NT1G, Qrr Typ (nC)=8.8, RoHS=Pb-Free, V(BR)DSS Min (V)=20, VGS(th) Max (V)=1.4, VGS Max (V)=8
R1: library part CMP-1666-00005-4, "Chip Resistor, 10 KOhm, +/- 1%, 100 mW, -55 to 155 degC, 0603 (1608 Metric), RoHS, Tape and Reel", Manufacturer="Vishay Semiconductor", Max Operating Temperature="155 degC", Min Operating Temperature="-55 degC", Package Quantity=5000, Voltage Rating="75 V", ComponentLink1Description="Manufacturer URL", ComponentLink1URL=http://www.vishay.com/, ComponentLink2Description=Datasheet, ComponentLink2URL=https://datasheet.ciiva.com/11809/0900766b80d98afc-11809037.pdf, DatasheetVersion=06/2012, Height="0.45 mm", Length="1.55 mm", Mounting Technology="Surface Mount", PackageDescription="2-Pin Surface Mount Device, Body 1.575 x 0.85 mm", PackageReference=0603, Packaging="Tape and Reel", REACH SVHC=Unknown, RoHSCompliant=true
R2 R3 R5 R7: library part CMP-2002-00607-3, "Chip Resistor, 10 KOhm, +/- 1%, 100 mW, -55 to 155 degC, 0402 (1005 Metric), RoHS, Tape and Reel", Case\/Package=0402, Case Code (Metric)=1005, Manufacturer="Basic Passives", Max Operating Temperature="155 degC", Min Operating Temperature="-55 degC", Package Quantity=10000, PartNumber=ERJ-2RKF1002X, Power Rating="100 mW", Resistance="10 KOhm", Tolerance=1%, Voltage Rating="50 V", Case Code (Imperial)=0402, ComponentLink1Description="Manufacturer URL", ComponentLink1URL=http://www.panasonic.com/, ComponentLink2Description=Datasheet, ComponentLink2URL=http://industrial.panasonic.com/cdbs/www-data/pdf/RDA0000/AOA0000C86.pdf, DatasheetVersion=04/2015, Height="0.35 mm", Length="1 mm", Mount="Surface Mount", Mounting Technology="Surface Mount", PackageDescription="2-Pin Surface Mount Device, Body 1 x 0.5 mm", PackageReference=0402, Packaging="Tape and Reel", Pins=2, Radiation Hardening=No, REACH SVHC=Yes, RoHSCompliant=true, Width="0.5 mm"
SW1: library part CMP-1677-00003-1, "Ultra-Small Tactile Switch, 1 to 50 mA, 3 to 12 V, -25 to 70 degC, 2-Pin SMD, RoHS, Tape and Reel", Capacitance="470 uF", Case\Package=Radial, Max Operating Temperature="85 degC", Min Operating Temperature="-40 degC", Package Quantity=200, Tolerance=20%, Voltage Rating="50 V", ComponentLink1Description="Manufacturer URL", ComponentLink1URL=http://www.omron.com/, ComponentLink2Description=Datasheet, ComponentLink2URL=https://www.omron.com/ecb/products/pdf/en-b3u.pdf, DatasheetVersion=Jan-15, Diameter="10 mm", Height="20 mm", Lead Pitch="5 mm", Length="20 mm", Mount="Through Hole", PackageDescription="2-Pin Surface Mount Device, Body 4 x 3.2 mm", PackageReference=B3U-3000P, Packaging=Bulk, Pins=2, Radiation Hardening=No, REACH SVHC="No SVHC", RoHSCompliant=true, Voltage Rating (DC)="50 V"
U1: library part CMP-2000-07336-1, "6-Bit Bidirectional Level-Shifting and Voltage Translator with Auto-Direction Sensing and +/- 15-kV ESD Protection, 1.2 to 3.6 V, -40 to 85 degC, 16-Pin TSSOP (PW), Green (RoHS & no Sb/Br), Tape and Reel", Manufacturer="Texas Instruments", Operating Temperature=-40°C~85°C, Package / Case="16-TSSOP(0.173\",4.40mmWidth)", Package Description="16-Pin Small Outline Package Integrated Circuit, Body 5 x 4.4 mm, Pitch 0.65 mm", Package Reference=PW16, Standard Package=1, Supplier Device Package=16-TSSOP, Voltage - Supply=1.2V~3.6V,1.65V~5.5V, Category=IntegratedCircuits(ICs), Data Rate=100Mbps, Datasheet URL=http://www.ti.com/general/docs/lit/getliterature.tsp?genericPartNumber=TXB0106&fileType=pdf, Datasheet Version="Rev. B, 06/2015", Differential - Input=Output:No/No, Dynamic Catalog=TXBSeries, Family=Logic-Translators, Input Type=Logic, Logic Function=Translator,Bidirectional, Manufacturer URL=http://www.ti.com/, Mounting Technology=SurfaceMount, Number of Bits=6, Number of Channels=6, Number of Outputs/Channel=1, Other Names=296-23759-1, Output Type=Logic, Packaging=CutTape(CT), Product Training Modules=VoltageLevelTranslation, Propagation Delay (Max)=4ns, Series=-
U4.1 U4.2: library part CMP-00855-1, "Buck Switching Regulator IC Positive Programmable 1.2V 1 Output 300mA 8-XFBGA, DSBGA", Max Input Voltage=5.5V, Max Operating Temperature=85°C, Max Output Voltage=3.3V, Min Input Voltage=2.15V, Min Operating Temperature=-40°C, Min Output Voltage=1.2V, Output Current=300mA, Quiescent Current=300nA, Switching Frequency=1.2MHz, Lead Free="Lead Free", Mount="Surface Mount", Number of Outputs=1, Packaging="Tape and Reel", Synchronous Rectifier=Yes
U5: library part CMP-01034-2, Package=QFN88
Y2: library part CMP-00422-1, "32.768kHz ±20ppm Crystal 7pF 70 kOhm -40°C ~ 85°C  Surface Mount 2-SMD, No Lead", Case Height="0.9 mm", Case Length="3.2 mm", Case Width="1.5 mm", Frequency="32.768 kHz", Frequency Stability="20 PPM", Load Capacitance="7 pF", Manufacturer=ABRACON, Operating Temperature Range="- 40 C to + 85 C", Package / Case="3.2 mm x 1.5 mm", Supplier Part Number=535-9543-2-ND, Brand=ABRACON, ComponentLink1Description=abs07-3174144.pdf, ComponentLink1URL=https://datasheet.ciiva.com/3174/abs07-3174144.pdf, ComponentLink2Description=abs07-16199467.pdf, ComponentLink2URL=https://datasheet.ciiva.com/16199/abs07-16199467.pdf, ComponentLink3Description=abs07-8344589.pdf, ComponentLink3URL=https://datasheet.ciiva.com/8344/abs07-8344589.pdf, ComponentLink4Description=abs07-855947.pdf, ComponentLink4URL=https://datasheet.ciiva.com/855/abs07-855947.pdf, ComponentLink5Description=abs07-855945.pdf, ComponentLink5URL=https://datasheet.ciiva.com/855/abs07-855945.pdf, ComponentLink6Description=abs07-855946.pdf, ComponentLink6URL=https://datasheet.ciiva.com/855/abs07-855946.pdf, Dimensions="1.5 mm W x 3.2 mm L x 0.9 mm H", ESR="70 kOhms", Factory Pack Quantity=3000, Manufacturer Part Number=ABS07-32.768KHZ-7-T, Mounting Style=SMD/SMT, Packaging=Reel, Product Category=Crystals, RoHS=Details, Series=ABS07, Supplier=Digikey, Termination Style=SMD/SMT, Tolerance="20 PPM", Type="Low Profile Crystal"

## Free pads (board coordinates)
  round 2.5 hole 1.6: H1(9,23.5)
  round 2.5 hole 1.6 paste+0: H2(19,23.5)

## Via types
v1: diameter 0.4, hole 0.2, Top Layer to Bottom Layer, tented both sides, 184 vias

## Nets (pads, with @x,y where several pads share a name; then routed paths per layer and width w, separated by ;. In a path a pad name is that pad's centre, name@x,y a point inside that pad or via, vN(x,y) a via of type N, cw(c..) or ccw(c..) an arc to the next point about the centre after c; other vN are vias at no path point)
1V8: *.11 C1.2 C2.2 C9.2 C11.2 C13.2 C15.2 C18.2 C21.2 C25.2 C26.1.2 C26.2 C28.2 I2C.1 J1.1 L2.1.2 M1.A4 M1.B4 M1.D1 M1.E4 M2.A4 M2.B4 M2.D1 M2.E4 R2.2 R3.2 R5.2 R7.2 U1.2 U1.8 U4.1.C2 U5.A1 U5.A12 U5.A27 U5.A39 | length 44.7
  Top Layer w0.2: M1.A4@6.8,11.875 6.8,10.43 v1(7.65,9.58) ; v1(9.425,16.6) 9.425,15.72 9.8,15.345 M1.D1@9.8,14.875 ; v1(14.208,5.402) 14.21,5.4 15.919,5.4 16.319,5 ; M2.A4@17.75,5 18.25,5 19.5,6.25 v1(19.5,6.3)
  Top Layer w0.254: v1(6.304,12.428) 6.353,12.428 v1@6.355,12.43 ; v1@6.36,12.425 v1@6.355,12.43 ; v1@6.375,15.66 v1(6.36,15.66) 6.575,15.875 M1.E4@6.8,15.875 ; M1.B4@6.8,12.875 6.696,12.875 6.355,12.534 v1@6.355,12.43 ; R7.2@6.87,6.51 6.88,6.52 v1(7.65,6.52) ; U4.1.C2@11.454,-0.15 11.675,-0.15 11.906,-0.381 11.906,-1.573 C26.1.2@11.729,-1.75 ; v1(11.5,16.57) 12.02,16.05 U5.A1@12.4,16.05 ; v1(12,25.8) 12,25.125 12.125,25 12.125,24.35 C1.2@12.15,24.325 12.125,24.3 11.725,24.3 11.55,24.125 11.55,23.3 11.725,23.125 C2.2@12.15,23.125 ; U5.A12@12.95,10 12.97,9.98 v1(12.97,9.56) ; M2.E4@13.75,5 14.152,5.402 v1(14.208,5.402) ; v1(14.4,8.3) 14.7,8 M2.D1@14.75,8 M2.D1@14.8,8 ; U5.A39@15.7,16.6 v1(15.7,17.05) C15.2@15.7,17.7 ; 16.319,5 M2.B4@16.75,5 ; R5.2@18.15,-0.175 18.15,0.375 v1(18.4,0.625) ; U5.A27@19,12.75 v1(19.75,12.75)
  Bottom Layer w0.2: C25.2@4.55,12.025 4.342,11.817 4.342,9.983 4.7,9.625 5.65,9.625 7.605,9.625 v1(7.65,9.58) ; v1@9.45,16.6 9.6,16.75 C26.2@10.3,16.75 ; v1(14.208,5.402) 14.798,5.402 C21.2@14.925,5.275
  Bottom Layer w0.254: 5.65,9.625 5.625,9.65 U1.2@5.625,10.675 5.6,10.7 5.6,12.1 5.99,12.1 6.318,12.428 v1(6.304,12.428) ; v1(7.65,6.52) v1(7.65,9.58) 9.21,9.58 9.525,9.895 U1.8@9.525,10.675 ; C9.2@11.48,17.22 11.5,17.2 v1(11.5,16.57) ; v1(12,25.8) 12.2,25.6 *.11@12.2,24.965 ; C11.2@12.95,8.88 12.97,8.9 v1(12.97,9.56) ; v1(14.4,8.3) 14.45,8.25 C28.2@14.45,7.6 ; R2.2@17.73,20.375 17.728,20.377 17.728,20.972 v1(17.7,21) 17.728,21.028 17.778,21.028 R3.2@18.4,21.65 ; C13.2@19.1,12.375 19.375,12.375 v1(19.75,12.75)
  other v1: 8.675,-2.2 9.925,-2.2 11.075,-2.15
2V8: *.2 C3.2 C4.2 C26.2.2 L2.2.2 U4.2.C2 | length 4
  Top Layer w0.254: 7.165,3.57 7.165,2.747 7.542,2.37 U4.2.C2@7.64,2.37 ; v1(15.8,25.425) 15.975,25.25 C4.2@15.975,24.6 C3.2@15.975,23.4
  Bottom Layer w0.254: *.2@15.8,24.965 v1(15.8,25.425)
  other v1: 10.275,4.425
3V0: C27.1 P2.1 U1.15 | length 2.3
  Bottom Layer w0.15: C27.1@5.6,3.65 5.6,5.874 v1(5.629,5.903)
\C\S\1\0\: J1.0.2 M1.C2 | length 2
  Top Layer w0.125: v1(8.34,14.38) 8.335,14.38 8.315,14.36 M1.C2@8.8,13.875
  Bottom Layer w0.125: v1(8.34,14.38) 8.34,14.67 8.79,15.12 J1.0.2@8.79,15.488
\C\S\1\1\: J1.1.2 M1.A3 | length 3.3
  Top Layer w0.125: v1(7.23,12.503) 7.23,12.384 7.225,12.38 7.765,11.84 M1.A3@7.8,11.875
  Bottom Layer w0.125: J1.1.2@7.06,14.605 7.03,14.575 7.03,14.39 6.79,14.15 6.79,12.943 v1(7.23,12.503)
\C\S\2\0\: J2.0.2 M2.C2 | length 1.9
  Top Layer w0.125: M2.C2@15.75,7 v1@16.105,6.645 ; v1(16.105,6.678) v1@16.105,6.645 ; v1@16.105,6.645 16.105,6.555 16.135,6.525 16.18,6.57 v1@16.105,6.645
  Bottom Layer w0.125: v1(16.105,6.678) 16.112,6.678 16.75,7.316 J2.0.2@16.75,7.438
\C\S\2\1\: J2.1.2 M2.A3 | length 2.3
  Top Layer w0.125: M2.A3@17.75,6 18.47,6 v1(18.71,6.24)
  Bottom Layer w0.125: v1(18.71,6.24) 18.71,7.298 J2.1.2@18.825,7.413
AGND: *.1 C3.1 C4.1 NT1.1 | length 3.9
  Top Layer w0.2: v1(16.63,25.529) 16.63,25.495 16.875,25.25 C4.1@16.875,24.6 C3.1@16.875,23.4 17.3,23.4 NT1.1@17.5,23.2
  Bottom Layer w0.2: *.1@16.2,24.965 16.2,25.2 16.188,25.212 16.505,25.529 v1(16.63,25.529) v1@16.764,25.529
Cam_INT: *.9 U5.B40 | length 11.6
  Top Layer w0.125: v1(12.575,21.45) 13,21.45 14.075,22.525 14.075,24.15 13,25.225 v1(13,25.45)
  Bottom Layer w0.125: v1(12.575,21.45) 12.678,21.347 12.678,16.822 v1(13.45,16.05) ; *.9@13,24.965 v1(13,25.45)
Cam_TRIG: *.4 U5.A44 | length 17.3
  Top Layer w0.125: U5.A44@12.95,16.6 12.95,17.95 11.775,19.125 11.775,19.798 13.277,21.3 15.884,21.3 16.105,21.079 v1(16.205,21.079) ; v1(14.988,25.815) 15.25,25.553 15.25,23.2 15.675,22.775 16.23,22.775 16.825,22.775 17.7,21.9 v1@17.7,21.75
  Bottom Layer w0.125: v1(14.988,25.815) 14.988,24.977 *.4@15,24.965 ; v1(16.205,21.079) 17.029,21.079 17.675,21.725 v1(17.7,21.725)
CK2_n: M1.B1 M2.B1 U5.A15 | length 21.7
  Top Layer w0.125: v1(9.025,8.495) 9.025,8.4 9.525,7.9 9.582,7.843 9.697,7.843 9.922,8.067 10.037,8.067 10.152,7.952 10.152,7.838 9.927,7.613 9.927,7.498 10.075,7.35 10.45,7.35 10.625,7.175 11.893,7.175 12.668,7.95 13.323,7.95 13.648,7.625 16.138,7.625 16.513,8 M2.B1@16.75,8 16.812,7.938 16.812,7.863 16.95,7.725 17.275,7.725 17.45,7.9 17.45,8.111 16.923,8.637 16.319,8.637 16.19,8.766 16.073,8.766 16.023,8.815 15.9,8.815 15.751,8.666 15.167,8.666 v1(15.155,8.678)
  Top Layer w0.15: M1.B1@9.8,12.875 9.92,12.755 9.92,12.34 v1@9.96,12.38 ; v1(9.96,12.3) v1@9.96,12.38 ; v1@9.98,12.4 v1@9.96,12.38
  Bottom Layer w0.125: v1(14.6,10) 15.155,9.445 v1(15.155,8.678)
  Bottom Layer w0.15: v1(9.025,8.495) 9.025,8.795 9.185,8.955 9.345,8.955 9.46,8.84 9.46,8.615 9.7,8.375 9.925,8.375 10.092,8.542 10.092,9.186 10.17,9.265 10.17,11.77 9.96,11.98 v1(9.96,12.3) v1@10.05,12.39
CK2_p: M1.B2 M2.B2 U5.B14 | length 21.7
  Top Layer w0.125: v1(8.601,8.071) 9.001,8.071 9.073,7.998 9.971,7.1 10.208,7.1 10.38,6.929 10.415,6.929 10.418,6.925 11.997,6.925 12.772,7.7 13.219,7.7 13.544,7.375 16.138,7.375 16.513,7 M2.B2@16.75,7 16.812,7.063 16.812,7.337 16.95,7.475 17.379,7.475 17.7,7.796 17.7,8.287 17.1,8.887 16.422,8.887 16.294,9.016 16.234,9.016 16.185,9.065 15.593,9.065 v1(15.58,9.078)
  Top Layer w0.15: M1.B2@8.8,12.875 8.8,12.823 9.63,11.993 v1(9.63,11.67)
  Bottom Layer w0.125: v1(8.601,8.071) 8.587,8.084 8.587,8.782 8.601,8.795 ; v1(14.95,10.55) 14.95,10.537 15.227,10.261 15.227,9.727 15.58,9.374 v1(15.58,9.078)
  Bottom Layer w0.15: 8.601,8.795 9.061,9.255 9.469,9.255 9.564,9.16 9.72,9.16 9.792,9.232 9.792,9.311 9.9,9.419 9.9,11.318 v1@9.625,11.593
  Bottom Layer w0.2: v1@9.625,11.593 9.625,11.67 v1@9.625,11.675
DQ0: M1.D3 M2.D3 U5.D2 | length 29.1
  Top Layer w0.125: M1.D3@7.8,14.875 7.8,15.08 7.462,15.417 7.462,15.768 6.967,16.263 4.904,16.263 4.342,15.7 4.342,10.115 4.741,9.716 4.741,9.709 4.862,9.588 4.886,9.588 5.175,9.298 5.175,8.687 5.662,8.2 8.073,8.2 8.773,8.9 10.274,8.9 11.138,8.036 11.646,8.036 12.09,8.48 v1(12.09,9.06) 12.09,9.122 12.427,9.459 12.427,9.973 U5.D2@12.4,10 ; v1(12.5,4.66) 12.918,4.66 14.258,6 M2.D3@14.75,6
  Bottom Layer w0.125: v1(12.09,9.06) 11.988,9.06 11.95,9.022 12.21,8.762 12.21,5.03 12.5,4.74 v1(12.5,4.66)
DQ1: M1.D2 M2.D2 U5.A11 | length 30
  Top Layer w0.125: 4.117,9.975 4.117,15.793 4.811,16.488 7.665,16.488 8.138,16.015 8.138,15.537 M1.D2@8.8,14.875 ; 4.125,9.975 4.325,9.775 4.325,8.867 5.442,7.75 7.96,7.75 9.633,6.078 10.411,6.078 10.428,6.06 v1(12.62,6.06) 12.651,6.091 13.34,6.091 13.567,6.318 13.567,6.34 14.227,7 M2.D2@14.75,7 ; v1(12.04,9.62) 12.04,10.19 U5.A11@12.4,10.55
  Bottom Layer w0.125: v1(12.04,9.62) 12.04,9.72 12.102,9.657 12.11,9.657 12.477,9.29 12.477,6.203 v1(12.62,6.06)
DQ2: M1.C4 M2.C4 U5.B10 | length 29.9
  Top Layer w0.125: M1.C4@6.8,13.875 6.83,13.905 6.83,14.358 6.42,14.767 6.385,14.767 5.94,15.213 5.554,15.213 4.792,14.45 4.792,10.464 6.03,9.226 6.049,9.226 6.103,9.172 7.847,9.172 8.5,9.825 10.333,9.825 11.214,10.707 v1(11.252,10.707) ; v1(12.28,3.29) 12.377,3.387 14.615,3.387 15.088,3.86 15.088,4.338 M2.C4@15.75,5
  Bottom Layer w0.125: 11.518,11.01 v1@11.252,10.744 ; v1(12.28,3.29) 12.28,3.358 11.968,3.671 11.968,3.791 11.755,4.003 11.755,6.645 10.855,7.545 10.855,7.883 11.004,8.033 11.004,8.809 11.112,8.916 11.112,10.511 11.307,10.706 11.307,10.8 v1@11.252,10.744 ; v1(12.95,11.05) 11.56,11.05 11.252,10.742 v1(11.252,10.707) v1@11.252,10.744
DQ3: M1.D4 M2.D4 U5.A10 | length 27.7
  Top Layer w0.125: M1.D4@6.8,14.875 6.567,15.108 6.363,15.108 6.033,15.438 5.461,15.438 4.567,14.543 4.567,10.208 4.962,9.813 4.979,9.813 5.4,9.391 5.4,9.182 5.4,8.78 5.755,8.425 7.979,8.425 8.679,9.125 10.375,9.125 11.004,8.496 11.004,8.488 11.231,8.261 11.552,8.261 11.779,8.488 11.779,8.809 11.617,8.971 11.617,9.263 v1(11.56,9.32) 11.56,9.69 11.78,9.91 11.78,10.404 11.84,10.463 11.84,10.49 12.363,11.013 12.363,11.038 12.424,11.1 U5.A10@12.45,11.1 ; v1(12.3,4.07) 12.472,4.07 12.789,4.388 14.138,4.388 M2.D4@14.75,5
  Bottom Layer w0.125: v1(11.56,9.32) 11.702,9.177 11.702,8.899 11.98,8.622 11.98,4.51 12.3,4.19 v1(12.3,4.07)
DQ4: M1.D5 M2.D5 U5.B8 | length 24.4
  Top Layer w0.125: M1.D5@5.8,14.875 5.535,14.875 5.017,14.357 5.017,12.008 5.525,11.5 5.938,11.5 6.663,12.225 6.927,12.225 7.677,11.475 8.35,11.475 9.04,10.785 10.515,10.785 v1(11.09,11.36) ; v1(11.58,3.63) 11.627,3.677 12.44,3.677 12.505,3.612 14.362,3.612 M2.D5@14.75,4
  Bottom Layer w0.125: v1(11.09,11.36) 11.082,11.352 11.082,11.05 10.889,10.857 10.889,10.607 10.887,10.604 10.887,9.01 10.779,8.902 10.779,8.126 10.63,7.976 10.63,7.452 11.53,6.552 11.53,3.91 11.58,3.86 v1(11.58,3.63) ; 11.32,11.36 11.668,11.36 11.958,11.649 11.958,11.708 12.3,12.05 v1(12.95,12.05)
DQ5: M1.E3 M2.E3 U5.A8 | length 20.4
  Top Layer w0.125: M1.E3@7.8,15.875 7.913,15.762 7.913,15.444 8.138,15.219 8.138,14.726 7.912,14.5 7.912,14.24 8.138,14.015 8.138,13.735 7.87,13.468 7.87,13.288 8.4,12.758 8.421,12.758 8.652,12.526 8.652,12.204 8.462,12.015 8.462,11.989 ; 8.462,11.926 8.462,11.735 9.14,11.057 10.239,11.057 10.929,11.747 11.507,11.747 v1(11.57,11.81) 11.96,12.2 U5.A8@12.4,12.2 ; v1(10.25,5.69) 10.975,5.69 10.958,5.672 13.422,5.672 M2.E3@13.75,6
  Bottom Layer w0.125: v1(10.25,5.69) 10.397,5.837 10.397,7.01 10.33,7.078 10.33,7.142 10.338,7.149 10.338,8.002 10.554,8.219 10.554,8.995 10.64,9.08 10.64,11.47 10.98,11.81 v1(11.57,11.81)
DQ6: M1.E2 M2.E2 U5.B7 | length 17.8
  Top Layer w0.125: M1.E2@8.8,15.875 9.437,15.238 9.434,15.234 9.462,15.205 9.462,14.735 10.228,13.97 v1(10.52,13.97) ; v1(10,6.7) 12.394,6.7 12.397,6.703 12.857,6.703 13.019,6.866 13.126,6.866 13.26,7 M2.E2@13.75,7
  Bottom Layer w0.125: v1(10,6.7) 10,7.98 10.01,7.99 10.009,7.991 10.329,8.312 10.329,9.088 10.415,9.174 10.415,12.397 10.24,12.572 10.24,12.915 11.013,13.688 11.068,13.688 ; v1(10.52,13.97) 10.725,13.97 10.755,14 11.068,13.688 ; v1(12.95,12.55) 12.95,13.04 12.947,13.04 12.3,13.688 11.895,13.688 11.69,13.482 11.369,13.482 11.164,13.688 11.068,13.688